# Altium PCB openSDA.PcbDoc
Units mil, origin at the board's own origin, x right, y up, seen from the top; angles counter-clockwise.
Board outline 6000 x 4000 mil, 2 copper layers (Top Layer, Bottom Layer); 29 components, 18 nets, 81 pads, 20 vias.
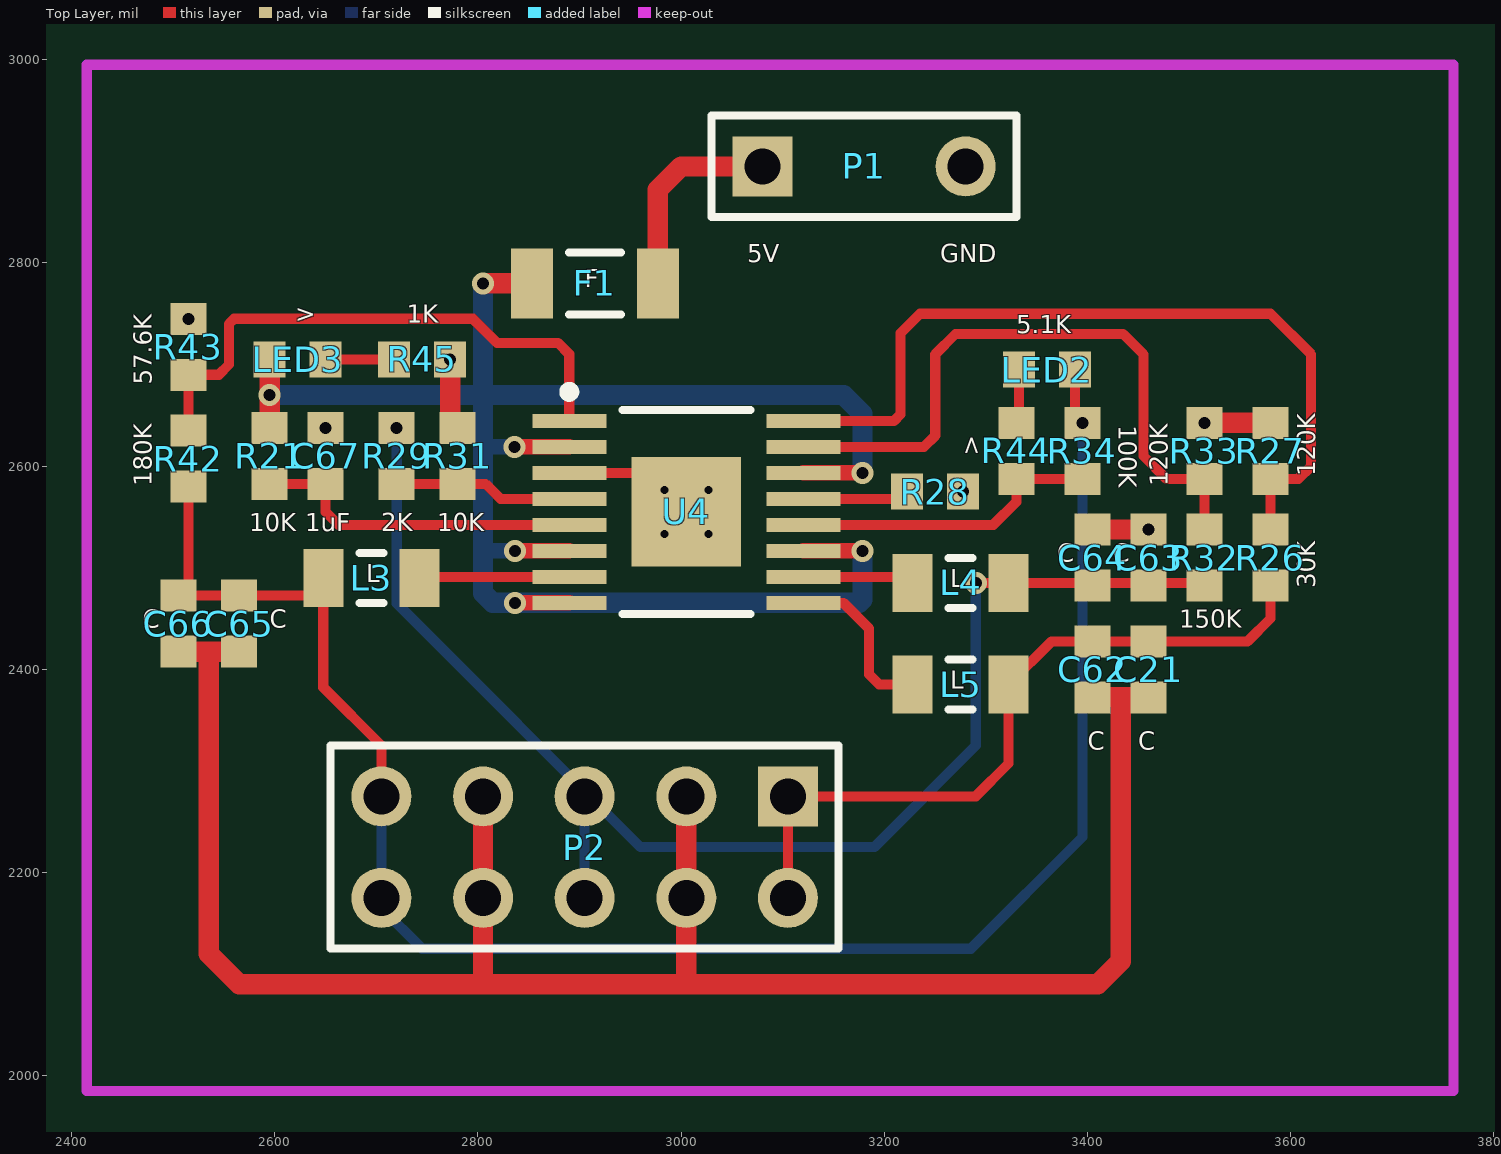
[diagram p0: Top Layer view]
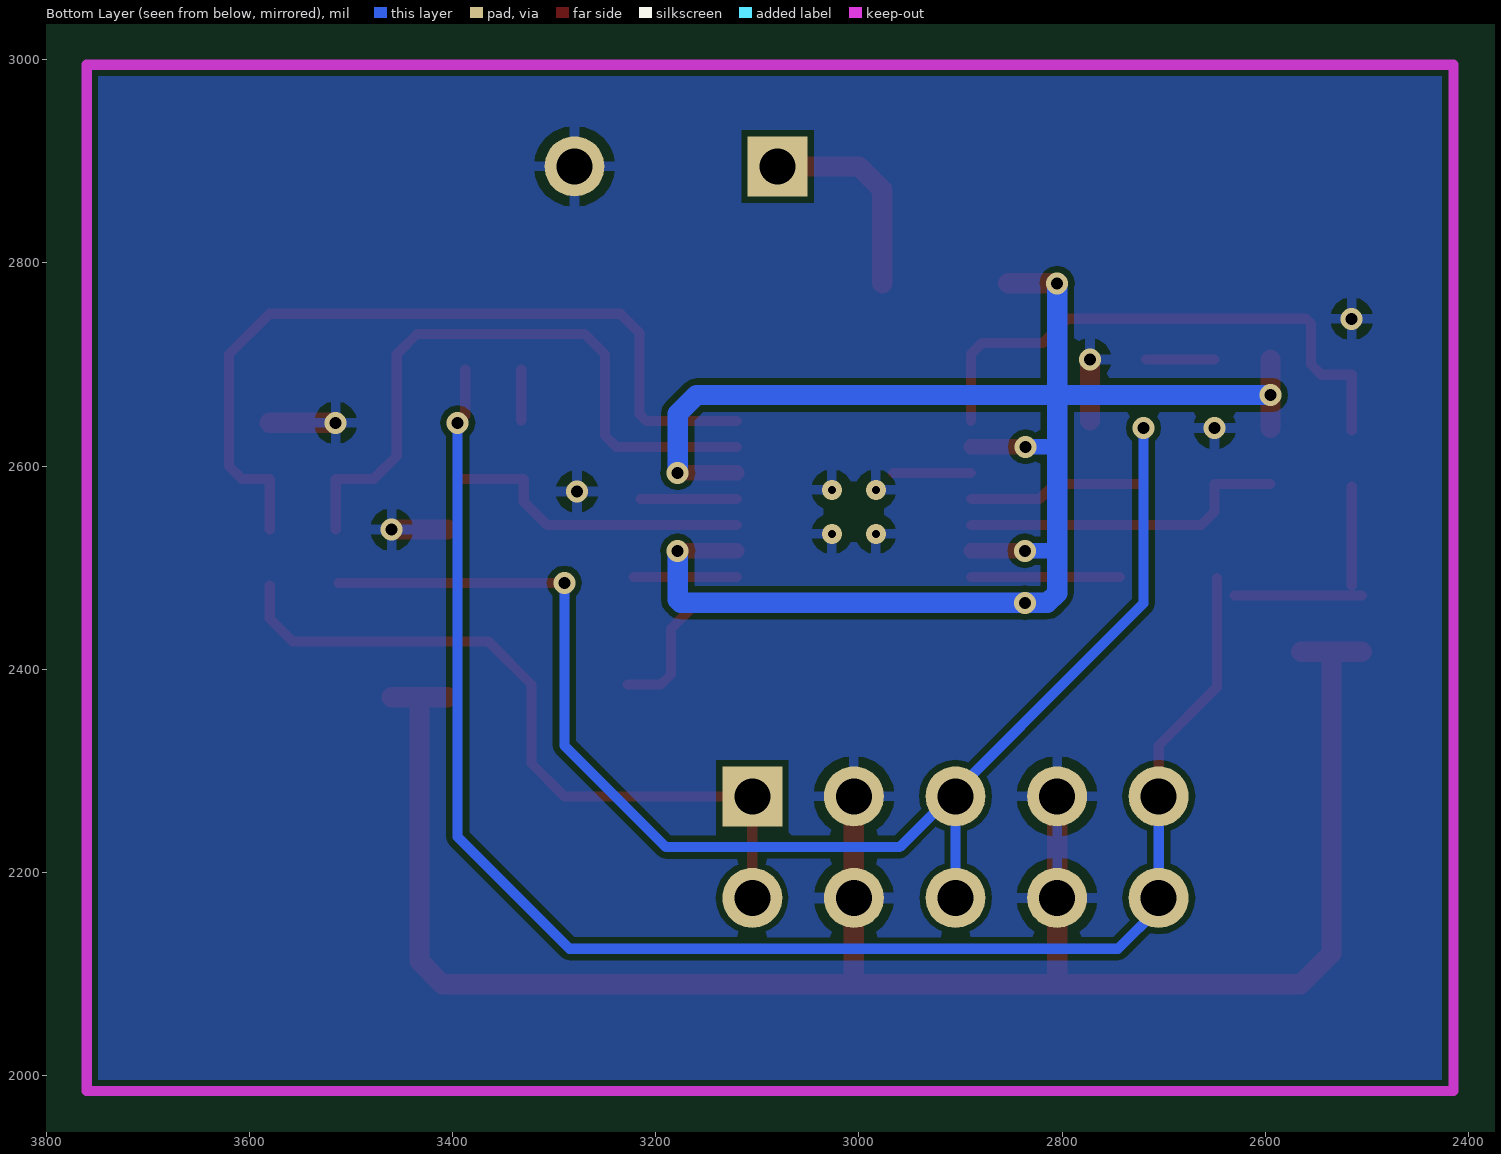
[diagram p1: Bottom Layer view, seen from below]

## Layer stack, top to bottom
Top Layer: signal copper 1.4
Dielectric: dielectric 12.6, FR-4, Dk 4.8
Bottom Layer: signal copper 1.4

## Board outline
1000,1000 7000,1000 7000,5000 1000,5000

## Design rules (kind name [scope] priority, off if disabled: settings)
Clearance [All] p1: gap=6
PolygonConnect [All] p1: connectstyle=Relief reliefconductorwidth=10 reliefentries=4 polygonreliefangle="90 Angle" airgapwidth=10
RoutingVias [All] p1: holewidth=28 width=50 viastyle="Through Hole" minholewidth=28 minwidth=50 maxholewidth=28 maxwidth=50
SolderMaskExpansion [All] p1: expansion=4
Width [All] p1: maxlimit=30 minlimit=6 preferedwidth=10 minimp=50.000000 maximp=50.000000 favimp=50.000000
28 further rules are at their usual default settings.

## Components (designator, comment, footprint, x,y, rotation, side; value= is the part's Value field where it differs from the comment)
C21 "Cap" 1608[0603] 3460,2400 r270 top
C62 "Cap" 1608[0603] 3405,2400 r270 top
C63 "Cap" 1608[0603] 3460,2510 r90 top
C64 "Cap" 1608[0603] 3405,2510 r90 top
C65 "Cap" 1608[0603] 2565,2445 r270 top
C66 "Cap" 1608[0603] 2505,2445 r270 top
C67 "Cap" 1608[0603] 2650,2610 r90 top
F1 "Fuse 1" 1206 2915,2780 r0 top
L3 "Inductor" C2012 2695,2490 r0 top
L4 "Inductor" C2012 3275,2485 r0 top
L5 "Inductor" C2012 3275,2385 r0 top
LED2 "LED" 1608[0603] 3360,2695 r180 top
LED3 "LED" 1608[0603] 2622.56,2705 r0 top
P1 "Header 3" HDR1X3 3080,2895 r0 top
P2 "Header 5X2" HDR2X5 3105,2275 r180 top
R21 "" 1608[0603] 2595,2610 r270 top
R26 "精密电阻" 1608[0603] 3580,2510 r90 top
R27 "精密电阻" 1608[0603] 3580,2615 r90 top
R28 "" 1608[0603] 3250,2575 r180 top
R29 "" 1608[0603] 2720,2610 r270 top
R31 "" 1608[0603] 2780,2610 r90 top
R32 "精密电阻" 1608[0603] 3515,2510 r90 top
R33 "精密电阻" 1608[0603] 3515,2615 r90 top
R34 "" 1608[0603] 3395,2615 r270 top
R42 "精密电阻" 1608[0603] 2515,2607.44 r90 top
R43 "精密电阻" 1608[0603] 2515,2717.44 r90 top
R44 "" 1608[0603] 3330,2615 r270 top
R45 "" 1608[0603] 2745,2705 r0 top
U4 "LTC3569" SOP127P600-8N 3005,2555 r0 top

## Footprints (in the part's own frame and the unit in brackets; to place one, negate y for a bottom-side part, rotate by r counter-clockwise, add the part's x,y. Pads: shape width x height; smd on the part's side, far side on the other; paste and mask are expansions set on the pad)
1206 [mm]
  rect 1.05x1.75 smd: 1(-1.575,0) 2(1.575,0)
  silkscreen extent -0.65,-0.77 0.65,0.77, body extent -1.6,-0.8 1.6,0.8, height 1.6
1608[0603] [mm] "Chip Capacitor, Body 1.6x0.8mm, IPC High Density"
  rect 0.8x0.9 smd: 1(-0.7,0) 2(0.7,0)
  body extent -0.87,-0.48 0.87,0.48, height 1.3
C2012 [mm] "Chip Capacitor, 2-Leads, Body 2.0x1.2mm, IPC Low Density"
  rect 1x1.45 smd: 1(-1.2,0) 2(1.2,0)
  silkscreen extent -0.3,-0.63 0.3,0.63, body extent -0.98,-0.6 1.02,0.6, height 0.5
HDR1X3 [mm] "Connector; Header; 3 Position"
  rect 1.5x1.5 hole 0.9: 1(0,0)
  round 1.5 hole 0.9: 3(5.08,0)
  silkscreen extent -1.27,-1.27 6.35,1.27, body extent -1.27,-1.27 6.35,1.27, height 7.58
HDR2X5 [mm] "Connector; Header; 5x2 Position"
  rect 1.5x1.5 hole 0.9: 1(0,0)
  round 1.5 hole 0.9: 2(0,2.54) 3(2.54,0) 4(2.54,2.54) 5(5.08,0) 6(5.08,2.54) 7(7.62,0) 8(7.62,2.54) 9(10.16,0) 10(10.16,2.54)
  silkscreen extent -1.27,-1.27 11.43,3.81, body extent -1.27,-1.27 11.43,3.81, height 7.58
SOP127P600-8N [mm]
  rect 1.85x0.35 smd: 1(-2.925,2.275) 2(-2.925,1.625) 3(-2.925,0.975) 4(-2.925,0.325) 5(-2.925,-0.325) 6(-2.925,-0.975) 7(-2.925,-1.625) 8(-2.925,-2.275) 9(2.925,-2.275) 10(2.925,-1.625) 11(2.925,-0.975) 12(2.925,-0.325) 13(2.925,0.325) 14(2.925,0.975) 15(2.925,1.625) 16(2.925,2.275)
  rect 2.74x2.74 smd: 17(0,0)
  silkscreen extent -3.05,-2.55 1.6,3.12, body extent -2.25,-2.55 2.25,2.55, height 1.1

## Part data
C21 C62 C63 C64 C65 C66 C67: "贴片电容"
F1: "Fuse"
P1: "Header, 3-Pin"
P2: "Header, 5-Pin, Dual row"
R21 R26 R27 R28 R29 R31 R32 R33 R34 R42 R43 R44 R45: library part Res, "贴片电阻"

## Via types
v1: diameter 21.65, hole 11.81, Top Layer to Bottom Layer, tented both sides, 16 vias
v2: diameter 19.68, hole 7.87, Top Layer to Bottom Layer, 4 vias

## Nets (pads, with @x,y where several pads share a name; then routed paths per layer and width w, separated by ;. In a path a pad name is that pad's centre, name@x,y a point inside that pad or via, vN(x,y) a via of type N, cw(c..) or ccw(c..) an arc to the next point about the centre after c; other vN are vias at no path point)
1V0: C21.1 C62.1 L5.2 P2.1 P2.2 R26.1 | length 725.5
  Top Layer w10: P2.2 P2.1 3290,2275 3322.24,2307.24 L5.2 3364.8,2427.56 C62.1 C21.1 3557.56,2427.56 3580,2450 R26.1
1V8: C63.1 C64.1 L4.2 P2.5 P2.6 R29.1 R32.1 | length 1365.8
  Top Layer w10: v1(3290,2485) L4.2 R32.1@3512.44,2485
  Bottom Layer w10: v1(2720,2637.56) 2720,2465 2960,2225 3190,2225 3290,2325 v1(3290,2485) ; P2.6 P2.5
3V3: C65.1 C66.1 L3.1 LED2.1 P2.9 P2.10 R34.1 R42.1 | length 1776
  Top Layer w10: C66.1 C65.1 L3.1@2630.31,2472.56 ; C66.1@2515,2482.56 R42.1 ; L3.1 2647.76,2382.24 2705,2325 P2.9@2705,2260 ; R34.1@3387.56,2650 LED2.1
  Bottom Layer w10: P2.9@2705,2260 2705,2165 2745,2125 3285,2125 3395,2235 v1(3395,2642.56)
5V0: F1.1 LED3.1 R21.1 U4.2 U4.6 U4.8 U4.11 U4.14 | length 1833.2
  Top Layer w15: v1(2836.02,2618.98) U4.2 ; v1(2836.61,2465.43) U4.8 ; v1(2836.61,2516.61) U4.6 ; U4.11 v1(3178.39,2516.61) ; U4.14 v1(3178.39,2593.39)
  Top Layer w20: R21.1 v1(2595,2670) LED3.1 ; v1(2805,2780) F1.1
  Bottom Layer w10: 3175.43,2465.43 3178.39,2468.39
  Bottom Layer w15: 2806.02,2618.98 v1(2836.02,2618.98) ; 2806.61,2516.61 v1(2836.61,2516.61)
  Bottom Layer w20: v1(2595,2670) 2805,2670 ; v1(2805,2780) 2805,2670 ; 3175.43,2465.43 v1(2836.61,2465.43) 2814.57,2465.43 2805,2475 2805,2670 ; 3178.39,2468.39 v1(3178.39,2516.61) ; v1(3178.39,2593.39) 3178.39,2651.61 3160,2670 2805,2670
EN2: C67.1 R21.2 U4.5 | length 327.6
  Top Layer w10: R21.2 C67.1 2650,2555 2662.8,2542.2 U4.5
EN3: R29.2 R31.1 U4.4 | length 175.9
  Top Layer w10: R29.2 R31.1 2807.56,2582.44 2822.2,2567.8 U4.4
FB1: R26.2 R27.1 U4.16 | length 812
  Top Layer w10: U4.16 3209.57,2644.57 3215.93,2650.93 3215.93,2730.93 3235,2750 3580,2750 3620,2710 3620,2600 3607.44,2587.44 R27.1 R26.2
FB2: R32.2 R33.1 U4.15 | length 655.2
  Top Layer w10: U4.15 3238.98,2618.98 3250,2630 3250,2710 3270,2730 3435,2730 3455,2710 3455,2610 3477.56,2587.44 R33.1 R32.2
FB3: R42.2 R43.1 U4.1 | length 556
  Top Layer w10: R42.2 R43.1 2544.88,2689.88 2555,2700 2555,2740 2560,2745 2795,2745 2818.71,2721.29 2878.71,2721.29 2889.84,2710.16 U4.1
GND: C21.2 C62.2 C63.2 C64.2 C65.2 C66.2 C67.2 P1.3 P2.3 P2.4 P2.7 P2.8 R27.2 R28.1 R31.2 R33.2 R43.2 R45.2 U4.3 U4.17 | length 2218.4
  Top Layer w10: U4.3 U4.17@2966.61,2593.39
  Top Layer w20: C66.2 2535,2417.44 ; C65.2 2535,2417.44 ; R31.2@2772.56,2645 v1(2772.56,2705) ; P2.7 P2.8 2805,2090 ; P2.3 P2.4 3005,2090 ; C62.2 3432.5,2372.44 ; C64.2 v1(3460,2537.56) ; C21.2 3432.5,2372.44 ; v1(3515,2642.56) R27.2 ; 2535,2417.44 2535,2120 2565,2090 2805,2090 ; 2805,2090 3005,2090 ; 3005,2090 3410,2090 3432.5,2112.5 3432.5,2372.44
  other v1: 3277.56,2575 2650,2637.56 2515,2745
  other v2: 2983.35,2533.35 3026.65,2533.35 2983.35,2576.65 3026.65,2576.65
NetL3_2: L3.2 U4.7 | length 146.6
  Top Layer w10: L3.2@2743.27,2491.02 U4.7
NetL4_1: L4.1 U4.10 | length 101.6
  Top Layer w10: U4.10 L4.1@3221.73,2491.02
NetL5_1: L5.1 U4.9 | length 167.3
  Top Layer w10: U4.9 3159.57,2465.43 3185,2440 3185,2395 3195,2385 L5.1
NetLED2_2: LED2.2 R44.1 | length 50
  Top Layer w10: R44.1@3332.44,2645 LED2.2
NetLED3_2: LED3.2 R45.1 | length 67.3
  Top Layer w10: LED3.2 R45.1
NetR28_2: R28.2 U4.13 | length 94.8
  Top Layer w10: U4.13 R28.2@3215,2567.8
PGOOD: R34.2 R44.2 U4.12 | length 306.7
  Top Layer w10: U4.12 3307.2,2542.2 3330,2565 R44.2 R34.2
VBUS: F1.2 P1.1 | length 204.5
  Top Layer w20: F1.2 2977.01,2872.01 3000,2895 P1.1

## Polygon pours and split planes (outlines as drawn)
GND on Bottom Layer "Bottom-3.3V" (solid, remove dead copper, pour order 4): 2460,2995 2415,2995 2415,1985 3760,1985 3760,2995

## Keep-outs
Keep-Out Layer:
  lines w10: 2415,1985 3760,1985 3760,2995 2415,2995 2415,1985

## Silkscreen, mask and mechanical layers (free items; w line width, h text height)
Top Overlay:
  text "5V" at 3065,2795 h30
  text "GND" at 3255,2795 h30
  text "F" at 2905,2770 h30
  text ">" at 2620,2735 h30
  text "1K" at 2730,2735 h30
  text "5.1K" at 3330,2725 h30
  text "57.6K" at 2485,2680 h30 r90
  text "100K" at 3425,2640 h30 r270
  text ">" at 3300,2610 h30 r90
  text "120K" at 3630,2590 h30 r90
  text "180K" at 2485,2580 h30 r90
  text "120K" at 3485,2580 h30 r90
  text "10K" at 2575,2530 h30
  text "1uF" at 2630,2530 h30
  text "2K" at 2705,2530 h30
  text "10K" at 2760,2530 h30
  text "C" at 3370,2500 h30
  text "C" at 3425,2500 h30
  text "L" at 2690,2480 h30
  text "30K" at 3630,2480 h30 r90
  text "L" at 3265,2475 h30
  text "C" at 2470,2435 h30
  text "C" at 2595,2435 h30
  text "150K" at 3490,2435 h30
  text "L" at 3265,2375 h30
  text "C" at 3400,2315 h30
  text "C" at 3450,2315 h30